# Altium PCB YK.PcbDoc
Units mm, origin at the board's own origin, x right, y up, seen from the top; angles counter-clockwise.
Board outline 100 x 100 mm, 2 copper layers (Top Layer, Bottom Layer); 59 components, 51 nets, 234 pads, 0 vias.
Unrouted connection lines stored in the file: 165.
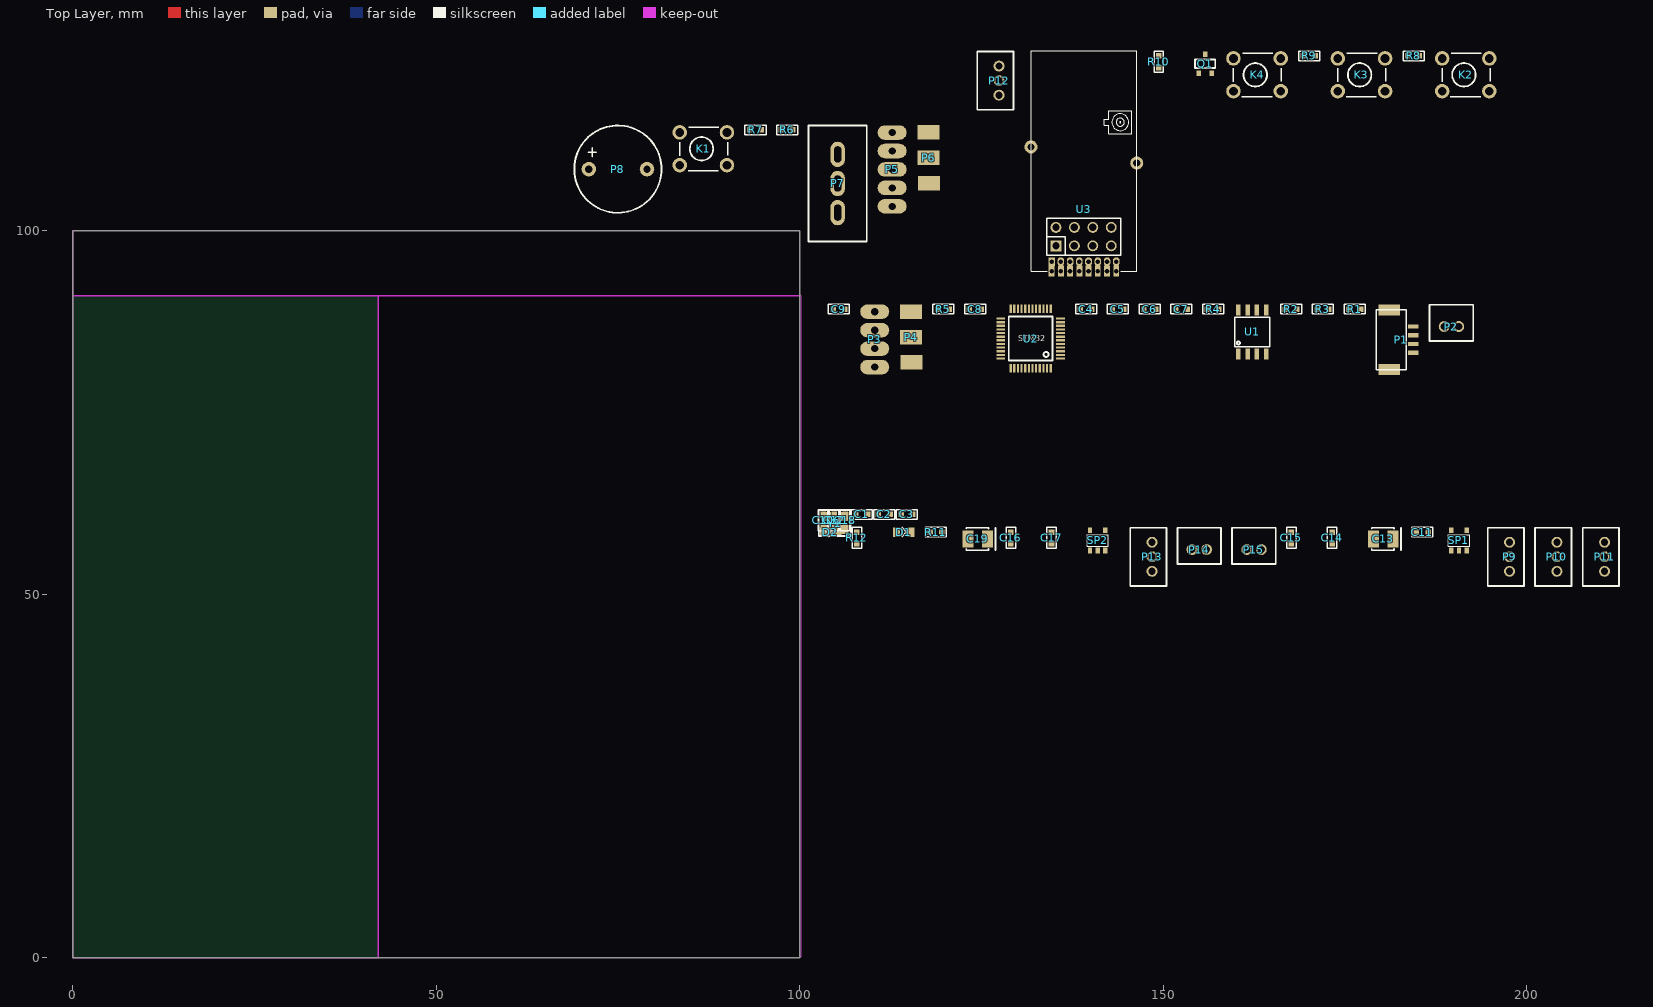
[diagram p0: Top Layer view]
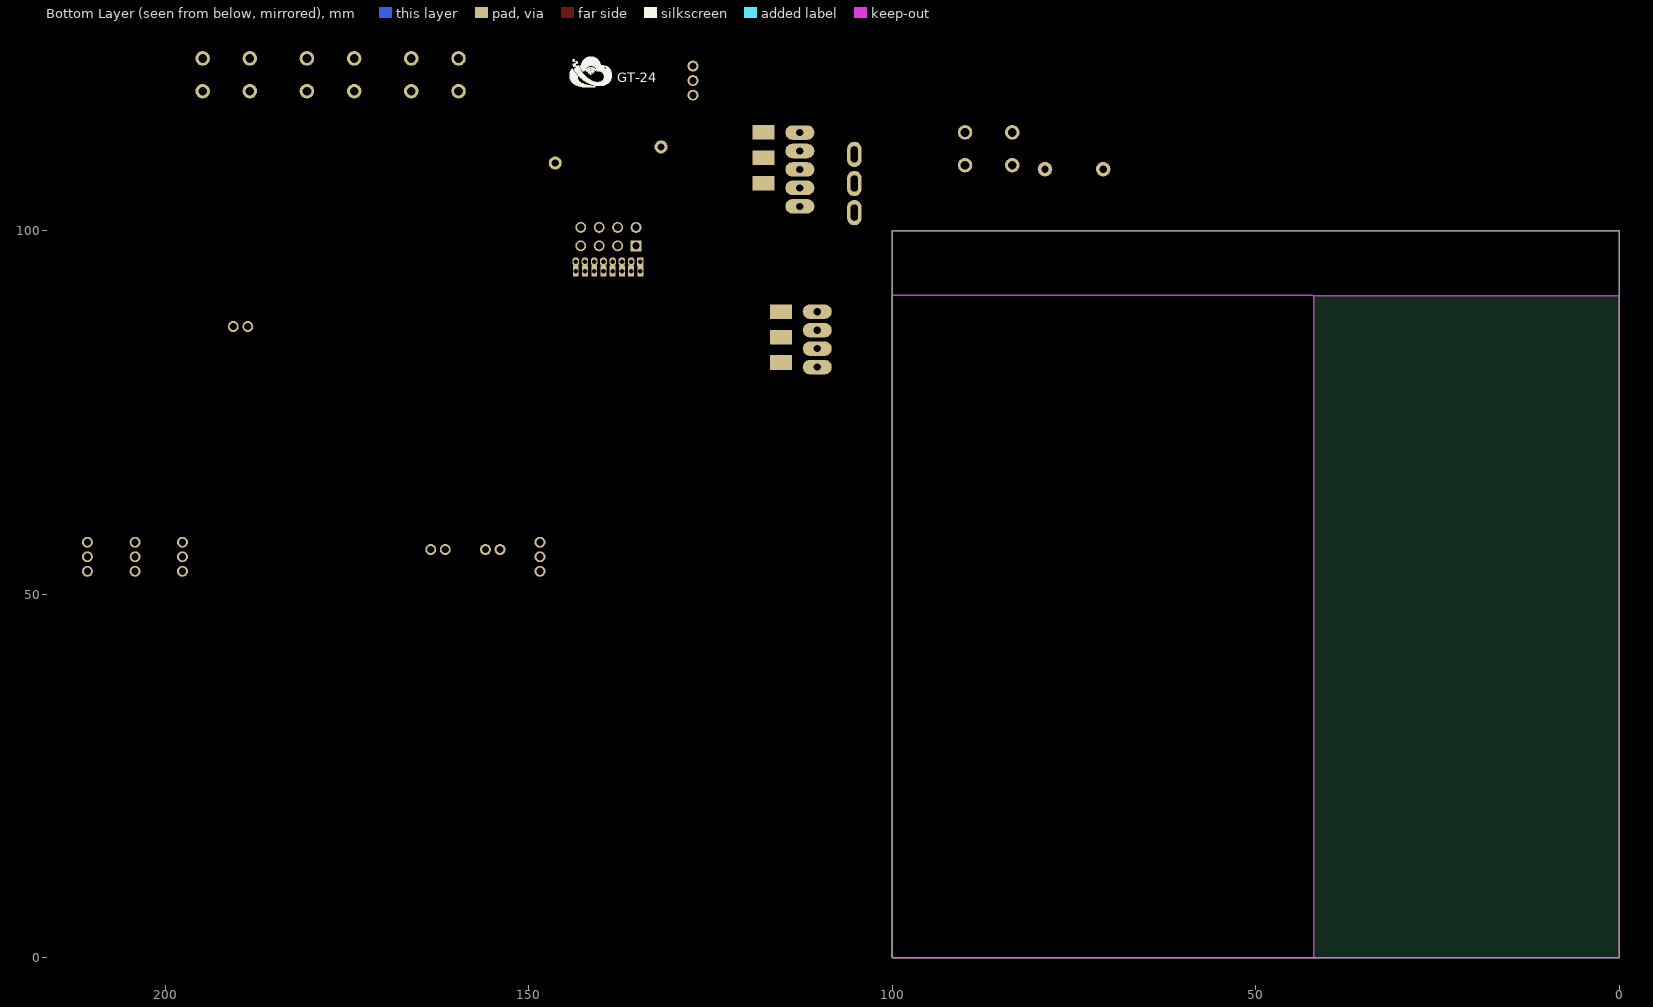
[diagram p1: Bottom Layer view, seen from below]

## Layer stack, top to bottom
Top Solder: solder mask 0.0102, Solder Resist, Dk 3.5
Top Layer: signal copper 0.0356
Dielectric1: dielectric 0.32, FR-4, Dk 4.8
Bottom Layer: signal copper 0.0356
Bottom Solder: solder mask 0.0102, Solder Resist, Dk 3.5

## Board outline
0,0 0,100 100,100 100,0
cut-out: 42,91 42.1,91.1 99.975,91.1 100.025,91.15 100.125,91.05 100.125,0.125 100,0 42,0
cut-out: 0,91 99.95,91 100,91.05 100,100 0,100

## Design rules (kind name [scope] priority, off if disabled: settings)
Clearance [All] p1: gap=0.152
ComponentClearance [All] p1: gap=0 collisioncheckmode=3 verticalgap=0 showdistances=FALSE
HoleToHoleClearance [All] p1: gap=0 allowstackedmicrovias=TRUE
MinimumSolderMaskSliver [All] p1: minsoldermaskwidth=0
PolygonConnect [All] p1: connectstyle=Relief reliefconductorwidth=0.254 reliefentries=4 polygonreliefangle="90 Angle" airgapwidth=0.254
RoutingVias [All] p1: holewidth=0.3 width=0.605 viastyle="Through Hole" minholewidth=0.3 minwidth=0.605 maxholewidth=0.3 maxwidth=0.605
SilkToSilkClearance [All] p1: silktosilkclearance=0
SilkToSolderMaskClearance [IsPad] p1: minsilkscreentomaskgap=0 clearancetoexposedcopper=TRUE
SolderMaskExpansion [All] p1: expansion=0.102
Width [All] p1: maxlimit=2.54 minlimit=0.203 preferedwidth=0.203 minimp=50.000000 maximp=50.000000 favimp=50.000000
24 further rules are at their usual default settings.

## Components (designator, comment, footprint, x,y, rotation, side; value= is the part's Value field where it differs from the comment)
C1 "C10uF" 0603C 107.714,60.947 r0 top
C2 "C10uF" 0603C 110.814,60.947 r0 top
C3 "C10uF" 0603C 113.914,60.947 r0 top
C4 "C0.1uF" 0603C 138.577,89.201 r0 top
C5 "C0.1uF" 0603C 142.953,89.201 r0 top
C6 "C0.1uF" 0603C 147.328,89.201 r0 top
C7 "C0.1uF" 0603C 151.678,89.201 r0 top
C8 "C22pF" 0603R 123.327,89.201 r0 top
C9 "C22pF" 0603R 104.576,89.201 r0 top
C10 "C10uF" 0603C 103.214,59.347 r90 top
C11 "C0.1uF" 0603C 184.818,58.526 r0 top
C12 "C10uF" 0603C 104.714,59.347 r90 top
C13 "C100uF" CAP-T-3630 181.593,57.576 r0 top
C14 "C1uF" 0603C 173.218,56.926 r90 top
C15 "C0.1uF" 0603C 167.617,56.926 r90 top
C16 "C1uF" 0603C 129.016,56.926 r90 top
C17 "C0.1uF" 0603C 134.616,56.926 r90 top
C18 "C10uF" 0603C 106.214,59.347 r90 top
C19 "C100uF" CAP-T-3630 125.815,57.576 r0 top
D1 "LED" LED 113.29,58.501 r0 top
D2 "LED" LED 103.214,58.501 r0 top
K1 "KEY-PB" SW-DIP 89.974,113.501 r0 top
K2 "KEY-PB" SW-DIP 194.848,123.676 r0 top
K3 "KEY-PB" SW-DIP 180.497,123.676 r0 top
K4 "KEY-PB" SW-DIP 166.147,123.676 r0 top
P1 "Head*4" NIUB-4P 184.38,83.201 r90 top
P2 "Head2" HEAD-2P-2.0 188.63,86.801 r0 top
P3 "Head*4" Head4_SPE4 110.301,81.226 r90 top
P4 "head*3" KEY_SPE2 115.301,81.851 r0 top
P5 "HEAD5" HEAD5_SPE5 112.7,103.326 r90 top
P6 "head*3" KEY_SPE2 117.701,106.501 r0 top
P7 "head*3" SWITCH_3P 105.2,102.476 r0 top
P8 "Head2" BEEP 70.973,108.451 r0 top
P9 "head*3" HEAD-3P-2.0 197.619,53.126 r90 top
P10 "head*3" HEAD-3P-2.0 204.144,53.126 r90 top
P11 "head*3" HEAD-3P-2.0 210.695,53.126 r90 top
P12 "head*3" HEAD-3P-2.0 127.395,118.626 r90 top
P13 "head*3" HEAD-3P-2.0 148.441,53.126 r90 top
P14 "Head2" HEAD-2P-2.0 153.942,56.126 r0 top
P15 "Head2" HEAD-2P-2.0 161.467,56.126 r0 top
Q1 "SI2302" SOT-23-3 154.846,121.651 r0 top
R1 "R10K" 0603R 175.529,89.201 r0 top
R2 "R1K" 0603R 166.779,89.201 r0 top
R3 "R1K" 0603R 171.154,89.201 r0 top
R4 "5K" 0603R 156.053,89.201 r0 top
R5 "R10K" 0603R 118.951,89.201 r0 top
R6 "R10K" 0603R 97.45,113.851 r0 top
R7 "R10K" 0603R 93.099,113.851 r0 top
R8 "R2K" 0603R 183.623,124.026 r0 top
R9 "R100R" 0603R 169.272,124.026 r0 top
R10 "R10K" 0603R 149.371,122.426 r90 top
R11 "R1K" 0603R 117.915,58.526 r0 top
R12 "R1K" 0603R 107.839,56.926 r90 top
SP1 "SP6201-adj" SOT23-5 189.618,55.976 r0 top
SP2 "SP6201-adj" SOT23-5 139.916,55.976 r0 top
U1 "TP4056" SOP-8 160.329,83.001 r90 top
U2 "STM32F103C8T6" STM32C8T6 130.902,83.251 r0 top
U3 "NRF_PA" NRF_PA 135.22,97.9 r0 top
Y1 "12M" XTAL3225 103.591,58.87 r0 top

## Footprints (in the part's own frame and the unit in brackets; to place one, negate y for a bottom-side part, rotate by r counter-clockwise, add the part's x,y. Pads: shape width x height; smd on the part's side, far side on the other; paste and mask are expansions set on the pad)
0603C [mil]
  rect 30x30 smd: 1(0,0) 2(62.99,0)
  silkscreen extent -26,-26 89,26
0603R [mil]
  rect 30x30 smd: 1(0,0) 2(62.99,0)
  silkscreen extent -26,-26 89,26
BEEP [mm]
  round 2 hole 1: 1(0,0) 2(8,0)
  silkscreen extent -2,-6 10,6
CAP-T-3630 [mm]
  rect 1.5x2.3 smd: 1(0,0) 2(-2.7,0)
  silkscreen extent -2.93,-1.55 1.07,1.55
Head4_SPE4 [mm]
  oval 2x4 hole 1: 1(0,0) 2(2.54,0) 3(5.08,0) 4(7.62,0)
HEAD5_SPE5 [mm]
  oval 2x4 hole 1: 1(0,0) 2(2.54,0) 3(5.08,0) 4(7.62,0) 5(10.16,0)
HEAD-2P-2.0 [mm]
  round 1.5 hole 1: 1(0,0) 2(2,0)
  silkscreen extent -2,-2 4,3
HEAD-3P-2.0 [mm]
  round 1.5 hole 1: 1(0,0) 2(2,0) 3(4,0)
  silkscreen extent -2,-2 6,3
KEY_SPE2 [mm]
  rect 3x2 smd far side: 1(0,0) 2(0,3.5) 3(0,7)
  rect 3x2 smd: 1(0.05,0.025) 2(0,3.5) 3(0,7)
LED [mil]
  rect 40x50 smd: 1(0,0) 2(78.74,0)
  silkscreen extent 29,-25 49,27
NIUB-4P [mm]
  rect 1.5x3 smd: 0(-2.32,3.3) 0(5.895,3.3)
  rect 0.6x1.5 smd: 1(0,0) 2(1.2,0) 3(2.4,0) 4(3.6,0)
  silkscreen extent -2.32,1 5.92,5.12
NRF_PA [mm]
  rect 0.8x1.5 hole 0.65: 1(-0.585,-3.48) 2(0.685,-3.48) 3(1.955,-3.48) 4(3.225,-3.48) 5(4.495,-3.48) 6(5.765,-3.48) 7(7.035,-3.48) 8(8.305,-3.48)
  rect 0.9x1.2 hole 0.65: 1(-0.585,-2.18)
  rect 1.5x1.5 hole 1: 1(0,0)
  round 1.5 hole 1: 2(0,2.54) 3(2.54,0) 4(2.54,2.54) 5(5.08,0) 6(5.08,2.54) 7(7.62,0) 8(7.62,2.54)
  oval 0.9x1.2 hole 0.65: 2(0.685,-2.18) 3(1.955,-2.18) 4(3.225,-2.18) 6(5.765,-2.18) 7(7.035,-2.18) 8(8.305,-2.18)
  oval 1x1.2 hole 0.65: 5(4.495,-2.18)
  round 1.8 hole 1: 9(-3.429,13.604) 10(11.123,11.39)
  silkscreen extent -3.39,-3.47 11.11,26.82
SOP-8 [mm]
  rect 1.5x0.6 smd: 1(0,0) 2(0,-1.27) 3(0,-2.54) 4(0,-3.81) 5(6.096,-3.81) 6(6.096,-2.54) 7(6.096,-1.27) 8(6.096,0)
  silkscreen extent 1.02,-4.32 5.08,0.51
SOT23-5 [mm]
  rect 0.6x0.8 smd: 1(0,0) 2(1.05,0) 3(2.1,0) 4(2.1,2.8) 5(0,2.8)
  silkscreen extent -0.4,0.6 2.5,2.2
SOT-23-3 [mm]
  rect 0.6x0.8 smd: 1(0,0) 2(1.8,0) 3(0.9,2.6)
  silkscreen extent -0.5,0.7 2.3,1.9
STM32C8T6 [mm]
  rect 1.2x0.3 smd: 1(4.95,-0.85) 2(4.95,-0.35) 3(4.95,0.15) 4(4.95,0.65) 5(4.95,1.15) 6(4.95,1.65) 7(4.95,2.15) 8(4.95,2.65) 9(4.95,3.15) 10(4.95,3.65) 11(4.95,4.15) 12(4.95,4.65) 25(-3.25,4.65) 26(-3.25,4.15) 27(-3.25,3.65) 28(-3.25,3.15) 29(-3.25,2.65) 30(-3.25,2.15) 31(-3.25,1.65) 32(-3.25,1.15) 33(-3.25,0.65) 34(-3.25,0.15) 35(-3.25,-0.35) 36(-3.25,-0.85)
  rect 0.3x1.2 smd: 13(3.6,6) 14(3.1,6) 15(2.6,6) 16(2.1,6) 17(1.6,6) 18(1.1,6) 19(0.6,6) 20(0.1,6) 21(-0.4,6) 22(-0.9,6) 23(-1.4,6) 24(-1.9,6) 37(-1.9,-2.2) 38(-1.4,-2.2) 39(-0.9,-2.2) 40(-0.4,-2.2) 41(0.1,-2.2) 42(0.6,-2.2) 43(1.1,-2.2) 44(1.6,-2.2) 45(2.1,-2.2) 46(2.6,-2.2) 47(3.1,-2.2) 48(3.6,-2.2)
  silkscreen extent -2.16,-1.1 3.86,4.92
SW-DIP [mm]
  round 2 hole 1.2: 1(-6.5,0) 1(0,0) 2(-6.5,-4.5) 2(0,-4.5)
  silkscreen extent -6.5,-5.25 0.1,0.72
SWITCH_3P [mm]
  oval 2x3.5 hole 1 slot 2.2 at 90 deg: 1(0,0) 2(0,4) 3(0,8)
  silkscreen extent -4,-4 4,12
XTAL3225 [mm]
  rect 1.4x1.2 smd: 1(0,0) 2(2.4,0) 3(2.4,1.8) 4(0,1.8)
  silkscreen extent -1,-0.9 3.4,2.7

## Part data
C14 C16: library part C0.1uF
Q1: library part MOSFET-N
R4: library part R5K
R6 R7: library part R100K
R8: library part R10K
SP1 SP2: library part SP6201
Y1: library part CRYSTAL, "Crystal"

## Nets (pads, with @x,y where several pads share a name; then routed paths per layer and width w, separated by ;. In a path a pad name is that pad's centre, name@x,y a point inside that pad or via, vN(x,y) a via of type N, cw(c..) or ccw(c..) an arc to the next point about the centre after c; other vN are vias at no path point)
2V8: C4.2 C5.2 C6.2 C7.2 C11.2 C12.1 C13.1 D1.1 D2.1 P9.3 P10.3 P11.3 P12.3 R1.2 SP1.5 U2.1 U2.9 U2.24 U2.36 U2.48
4V3: C14.2 C16.2 P1.4 P7.3 P8.1 R6.1 SP1.1 SP1.3 SP2.1 SP2.3
AD0: P9.2 U2.10
AD1: P10.2 U2.11
AD2: P11.2 U2.12
AD3: P12.2 U2.13
AD-BAT: C10.1 R6.2 R7.2 U2.14
BEEP: R9.2 U2.40
CE: U2.22 U3.2
CH5-0: P13.3 U2.15
CH5-1: P13.1 U2.16
CH6: P14.1 U2.17
CH7: P15.1 U2.18
CHA0: R2.1 U1.6 U2.42
CHA1: R3.1 U1.7 U2.43
CSN: U2.25 U3.3
GND: C1.2 C2.2 C3.2 C4.1 C5.1 C6.1 C7.1 C8.1 C9.1 C10.2 C11.1 C12.2 C13.2 C14.1 C15.1 C16.1 C17.1 C18.2 C19.2 K1.2 K2.2 K3.2 K4.2 P1.1 P2.2 P3.2 P4.1 P6.1 P9.1 P10.1 P11.1 P12.1 P13.2 P14.2 P15.2 Q1.2 R4.1 R5.2 R7.1 R8.1 R10.2 SP1.2 SP2.2 U1.1 U1.3 U2.8 U2.23 U2.35 U2.47 U3.8 U3.9 U3.10
JTCK: P1.3 U2.37
JTMS: P1.2 U2.34
KEY-B1: P4.2 U2.38
KEY-B2: P4.3 U2.29
KEY-B3: P6.2 U2.2
KEY-B4: P6.3 U2.3
KEY-B7: K3.1 U2.41
KEY-B8: K4.1 U2.39
KEY-P1: P3.3 U2.4
KEY-P2: P3.4 U2.19
KEY-P3: P5.1 U2.33
KEY-P4: P5.2 U2.32
KEY-P5: P5.3 U2.31
KEY-P6: P5.4 U2.30
NetC2_1: C2.1 P2.1 R2.2 R3.2 U1.4 U1.8
NetC8_2: C8.2 U2.5 Y1.1
NetC9_2: C9.2 U2.6 Y1.3
NetD1_2: D1.2 R11.1
NetD2_2: D2.2 R12.1
NetP8_2: P8.2 Q1.3
NetQ1_1: Q1.1 R9.1 R10.1
NetR4_2: R4.2 U1.2
NetR5_1: R5.1 U2.44
NetR8_2: R8.2 U2.20
PPM: P5.5
RF-IRQ: U2.21 U3.7
RFVCC: C15.2 C17.2 C18.1 C19.1 SP2.5 U3.1
RST: C1.1 R1.1 U2.7
SPI2-MISO: U2.27 U3.6
SPI2-MOSI: U2.28 U3.5
SPI2-SCK: U2.26 U3.4
TIM4_CH3: R12.2 U2.45
TIM4_CH4: R11.2 U2.46
VIN: C3.1 P3.1 P7.1 P7.2 U1.5
pads on no net: K1.1 K2.1 P1.0 SP1.4 SP2.4 Y1.2 Y1.4

## Keep-outs
Keep-Out Layer:
  lines w0.2: 0,0 0,91 42,91 42,0 0,0

## Text inside footprints (layer, text, board x,y; h text height)
U2: Top Overlay "STM32" at 130.052,84.801 h0.81
U3: Bottom Overlay "GT-24" at 137.834,119.899 h2.2